# EAGLE board power demo board(11vias) (EAGLE 5.06)
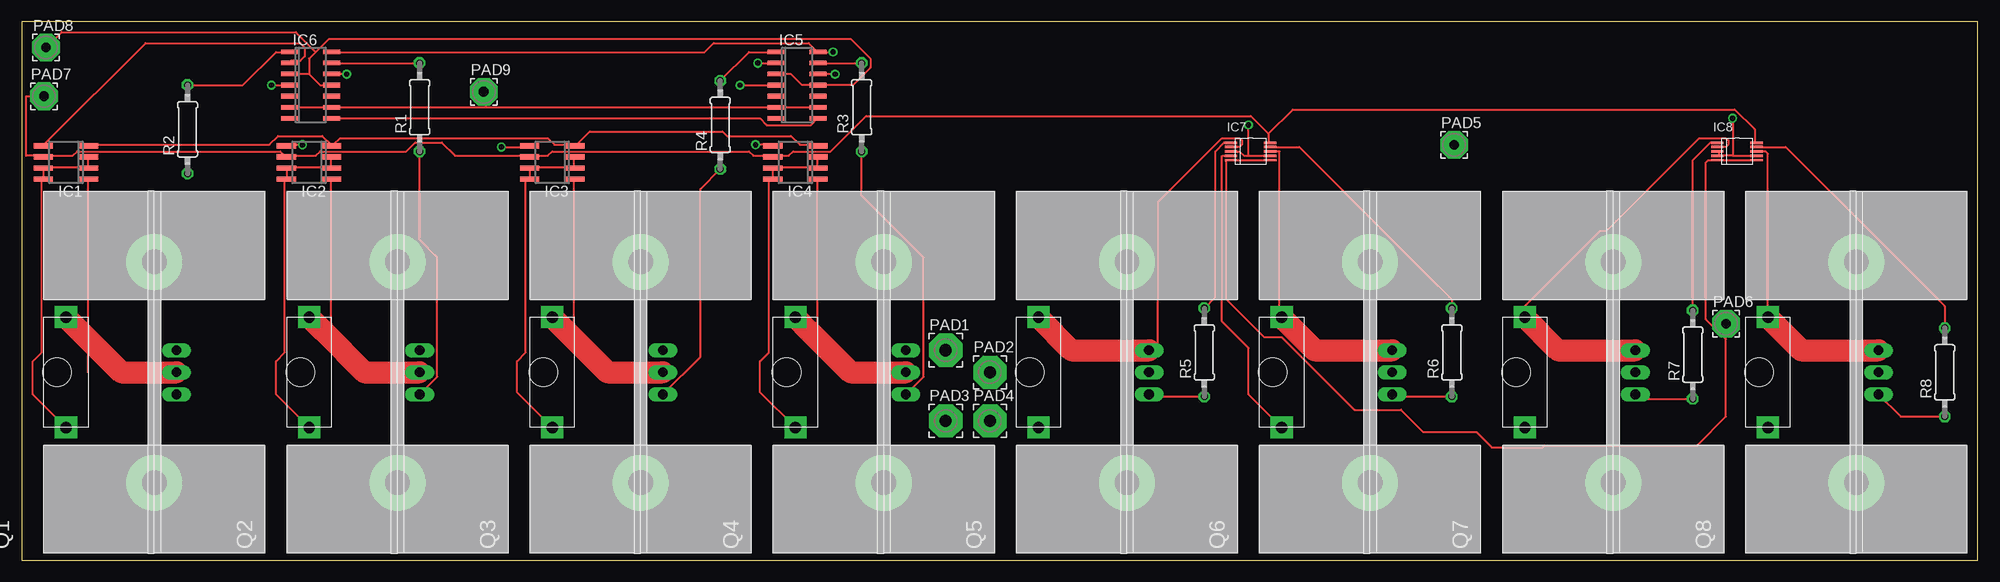
[diagram p0: board, top side]
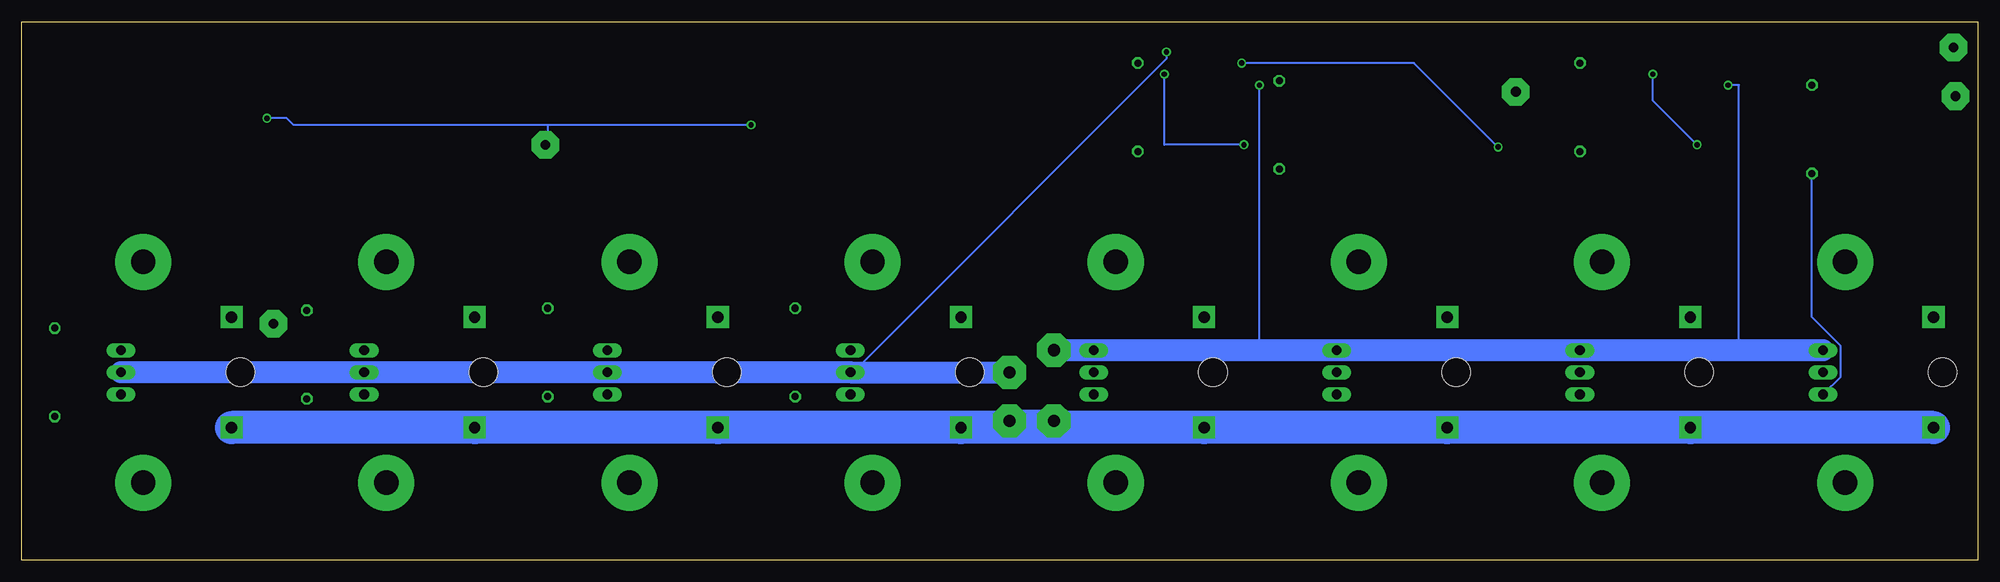
[diagram p1: board, bottom side, seen from below]

Size 224.77 x 61.9 mm. Coordinates in mm from the lower left corner, seen from the top.
Outline: 0,0 224.77,0 224.77,61.9 0,61.9 0,0
Copper layers (1*16): Top 0.035mm / dielectric 1.5mm / Bottom 0.035mm
Design rules "default *": minimum track width 10mil, minimum drill 24mil, track to track 10mil, track to pad 10mil, pad to pad 10mil, via to via 10mil, smd to smd 10mil, copper to edge 40mil, drill to drill 10mil, minimum pad ring 10mil, minimum via ring 8mil, stop-mask expansion 4mil, vias tented up to drill 0mil, thermal gap 10mil

## Footprints (pad centres in the part's own frame; a part is rotated, then mirrored left to right if it is on the bottom)
SO08 = smd 0.6 x 2.2: 1 -1.905,-2.6; 2 -0.635,-2.6; 3 0.635,-2.6; 4 1.905,-2.6; 5 1.905,2.6; 6 0.635,2.6; 7 -0.635,2.6; 8 -1.905,2.6
SO14 = smd 0.533 x 1.981: 1 -3.81,-2.219; 2 -2.54,-2.219; 3 -1.27,-2.219; 4 0,-2.219; 5 1.27,-2.219; 6 2.54,-2.219; 7 3.81,-2.219; 8 3.81,2.6; 9 2.54,2.6; 10 1.27,2.6; 11 0,2.6; 12 -1.27,2.6; 13 -2.54,2.6; 14 -3.81,2.6
UMAX10 = smd 0.28 x 1.4: 1 -1,-2; 2 -0.5,-2; 3 0,-2; 4 0.5,-2; 5 1,-2; 6 1,2.5; 7 0.5,2.5; 8 0,2.5; 9 -0.5,2.5; 10 -1,2.5
3,81/1,4 = drill 1.397 pad 3.81 octagon: 1 0,0
3,17/1,1 = drill 1.118 pad 3.175 octagon: 1 0,0
TO220-W/657-20ABP = drill 1.118 long: 1 -2.54,-2.54; 2 0,-2.54; 3 2.54,-2.54 | drill 2.8 pad 6.452 round: P$1 -12.7,0; P$2 12.7,0 | hole 3.302: 0,11.176
0207/10 = drill 0.813 octagon: 1 -5.08,0; 2 5.08,0
630HR050E = drill 1.3 pad 2.54 square: P$1 -6.35,0; P$2 6.35,0

## Placement (x,y rotation side)
IC1  AD8210D  [SO08]  5.08,45.72 90 top
IC2  AD8210D  [SO08]  33.02,45.72 90 top
IC3  AD8210D  [SO08]  60.96,45.72 90 top
IC4  AD8210D  [SO08]  88.9,45.72 90 top
IC5  [SO14]  88.9,54.61 270 top
IC6  [SO14]  33.02,54.61 270 top
IC7  MAX4233  [UMAX10]  140.97,46.99 270 top
IC8  MAX4233  [UMAX10]  196.85,46.99 270 top
PAD1  [3,81/1,4]  106.17,24.13 0 top
PAD2  [3,81/1,4]  111.25,21.59 0 top
PAD3  [3,81/1,4]  106.17,16 0 top
PAD4  [3,81/1,4]  111.25,16 0 top
PAD5  [3,17/1,1]  164.59,47.75 0 top
PAD6  [3,17/1,1]  195.83,27.18 0 top
PAD7  [3,17/1,1]  2.54,53.34 0 top
PAD8  [3,17/1,1]  2.79,58.93 0 top
PAD9  [3,17/1,1]  53.09,53.85 0 top
Q1  RFP12N10L  [TO220-W/657-20ABP]  15.24,21.59 90 top
Q2  RFP12N10L  [TO220-W/657-20ABP]  43.18,21.59 90 top
Q3  RFP12N10L  [TO220-W/657-20ABP]  71.12,21.59 90 top
Q4  RFP12N10L  [TO220-W/657-20ABP]  99.06,21.59 90 top
Q5  RFP12N10L  [TO220-W/657-20ABP]  127,21.59 90 top
Q6  RFP12N10L  [TO220-W/657-20ABP]  154.94,21.59 90 top
Q7  RFP12N10L  [TO220-W/657-20ABP]  182.88,21.59 90 top
Q8  RFP12N10L  [TO220-W/657-20ABP]  210.82,21.59 90 top
R1  50  [0207/10]  45.72,52.07 90 top
R2  50  [0207/10]  19.05,49.53 90 top
R3  50  [0207/10]  96.52,52.07 90 top
R4  50  [0207/10]  80.26,50.04 90 top
R5  50  [0207/10]  135.89,23.88 90 top
R6  50  [0207/10]  164.34,23.88 90 top
R7  50  [0207/10]  192.02,23.62 90 top
R8  50  [0207/10]  220.98,21.59 90 top
U$1  630HR050E  [630HR050E]  116.84,21.59 90 top
U$2  630HR050E  [630HR050E]  144.78,21.59 90 top
U$3  630HR050E  [630HR050E]  172.72,21.59 90 top
U$4  630HR050E  [630HR050E]  200.66,21.59 90 top
U$5  630HR050E  [630HR050E]  5.08,21.59 270 top
U$6  630HR050E  [630HR050E]  33.02,21.59 270 top
U$7  630HR050E  [630HR050E]  60.96,21.59 270 top
U$8  630HR050E  [630HR050E]  88.9,21.59 270 top

## Library data of the parts
IC1-IC8 Q1-Q8 U$1-U$8 = NEWPARTS
PAD1-PAD9 = wirepad
R1-R8 = rcl

## Nets
N$1: IC5.13 R3.2
N$2: IC1.1 Q1.2 U$5.P$1
N$3: IC2.1 Q2.2 U$6.P$1
N$4: IC3.1 Q3.2 U$7.P$1
N$5: IC7.3 IC7.7 IC8.3 IC8.4 IC8.7 PAD5.1
N$6: IC5.4 IC6.4 PAD1.1 Q1.3 Q2.3 Q3.3 Q4.3
N$7: IC7.2 Q5.3 U$1.P$2
N$8: IC7.8 Q6.3 U$2.P$2
N$9: IC8.2 Q7.3 U$3.P$2
N$10: IC8.8 Q8.3 U$4.P$2
N$11: IC5.14 IC6.14 PAD2.1 Q5.2 Q6.2 Q7.2 Q8.2
N$12: IC7.1 R5.2
N$13: Q5.1 R5.1
N$14: IC7.9 R6.2
N$15: Q6.1 R6.1
N$16: Q7.1 R7.1
N$17: IC8.1 R7.2
N$18: Q8.1 R8.1
N$19: IC8.9 R8.2
N$20: IC7.5 IC7.6 IC8.5 IC8.6 PAD6.1
N$21: IC4.1 Q4.2 U$8.P$1
N$22: IC5.6 IC5.9 IC6.6 IC6.9 PAD9.1
N$23: IC6.13 R1.2
N$24: Q1.1 R2.1
N$25: Q2.1 R1.1
N$26: Q3.1 R4.1
N$27: Q4.1 R3.1
N$28: IC5.1 R4.2
N$29: IC2.5 IC6.12
N$31: IC5.3 IC5.11 IC6.3 IC6.11 PAD8.1
N$32: IC1.5 IC6.2
N$33: IC6.1 R2.2
N$34: IC4.5 IC5.12
N$35: IC3.5 IC5.2
N$36: IC1.2 IC1.3 IC1.7 IC1.8 IC2.2 IC2.3 IC2.7 IC2.8 IC3.2 IC3.3 IC3.7 IC3.8 IC4.2 IC4.3 IC4.7 IC4.8 IC7.4 PAD3.1 PAD4.1 U$1.P$1 U$2.P$1 U$3.P$1 U$4.P$1 U$5.P$2 U$6.P$2 U$7.P$2 U$8.P$2
N$40: IC1.6 IC2.6 IC3.6 IC4.6 IC7.10 IC8.10 PAD7.1
NC: IC1.4 IC2.4 IC3.4 IC4.4
NC2: IC5.8 IC6.8

## Tracks (layer width: path | path; a pad name or v marks a point on that pad's centre or on a via)
N$1
  Top 0.254: 91.44,57.15 IC5.13 R3.2
N$2
  Top 0.254: IC1.1 7.62,43.69 7.62,27.18 | 7.62,21.59 7.62,27.18 | 7.62,27.18 6.73,26.29
  Top 2.54: Q1.2 11.43,21.59 6.73,26.29 U$5.P$1
N$3
  Top 0.254: 34.67,26.29 35.56,27.18 35.56,43.69 IC2.1
  Top 2.54: Q2.2 39.37,21.59 34.67,26.29 U$6.P$1
N$4
  Top 0.254: IC3.1 63.5,43.69 63.5,27.18 62.61,26.29
  Top 2.54: Q3.2 67.31,21.59 62.61,26.29 U$7.P$1
N$5  (via drill 0.61)
  Top 0.254: 140.97,46.48 140.46,46.48 139.95,46.99 IC7.3 | 140.97,46.48 143.26,46.48 IC7.7 | 195.07,46.48 195.07,46.99 IC8.3 | 196.6,46.48 195.07,46.48 | 196.6,46.48 199.14,46.48 IC8.7 | 195.07,46.48 IC8.4 | 140.97,46.48 v140.97,50.04 | v196.6,50.8 196.6,46.48
  Bottom 0.254: v140.97,50.04 164.34,50.04 | 164.34,50.04 193.55,50.04 194.31,50.8 v196.6,50.8 | PAD5.1 164.34,47.75 164.34,50.04
N$6  (via drill 0.6, 0.61)
  Top 0.254: v82.55,54.61 IC5.4 | v28.7,54.61 IC6.4
  Bottom 0.254: 27.43,24.13 27.43,54.61 v28.7,54.61 | 82.55,24.13 v82.55,54.61
  Bottom 2.54: Q1.3 27.43,24.13 Q2.3 Q3.3 82.55,24.13 Q4.3 PAD1.1
N$7
  Top 0.254: IC7.2 139.19,47.5 139.95,47.5 140.21,47.75 140.21,48.26 139.95,48.51 137.92,48.51 130.56,41.15 130.56,24.89 Q5.3
  Top 2.54: U$1.P$2 120.65,24.13 Q5.3
N$8
  Top 0.254: IC7.8 144.53,46.99 144.53,28.96 U$2.P$2
  Top 2.54: U$2.P$2 148.59,24.13 Q6.3
N$9
  Top 0.254: U$3.P$2 172.72,29.21 181.36,37.85 182.12,37.85 192.79,48.51 195.83,48.51 196.09,48.26 196.09,47.75 195.83,47.5 195.07,47.5 IC8.2
  Top 2.54: U$3.P$2 176.53,24.13 Q7.3
N$10
  Top 0.254: U$4.P$2 200.66,46.74 200.41,46.99 IC8.8
  Top 2.54: U$4.P$2 204.47,24.13 Q8.3
N$11  (via drill 0.61)
  Top 0.254: 35.56,58.42 IC6.14 78.49,58.42 79.5,59.44 90.42,59.44 91.44,58.42 IC5.14 v93.22,58.42
  Bottom 0.254: v93.22,58.42 93.22,57.66 128.52,22.35 Q5.2
  Bottom 2.54: Q8.2 Q7.2 Q6.2 Q5.2 PAD2.1
N$12
  Top 0.254: IC7.1 138.94,48.01 138.18,48.01 137.16,46.99 137.16,30.23 R5.2
N$13
  Top 0.254: R5.1 129.79,18.8 Q5.1
N$14
  Top 0.254: R6.2 164.34,29.97 146.81,47.5 143.51,47.5 IC7.9
N$15
  Top 0.254: R6.1 157.73,18.8 Q6.1
N$16
  Top 0.254: R7.1 185.93,18.54 Q7.1
N$17
  Top 0.254: R7.2 192.02,45.97 194.06,48.01 194.82,48.01 IC8.1
N$18
  Top 0.254: R8.1 215.9,16.51 Q8.1
N$19
  Top 0.254: R8.2 220.98,29.21 202.69,47.5 199.39,47.5 IC8.9
N$20
  Top 0.254: IC7.6 143.26,45.97 139.19,45.97 IC7.5 138.94,45.97 138.43,45.97 138.43,29.97 142.75,25.65 144.78,25.65 153.16,17.27 158.5,17.27 161.04,14.73 167.13,14.73 168.91,12.95 174.75,12.95 175.01,13.21 192.53,13.21 195.83,16.51 195.83,25.4 | IC8.6 199.14,45.97 195.07,45.97 IC8.5 194.82,45.97 193.8,45.97 193.55,45.72 193.55,27.69 195.83,25.4 | 195.83,25.4 PAD6.1
N$21
  Top 0.254: IC4.1 91.44,43.69 91.44,27.18 90.55,26.29
  Top 2.54: Q4.2 95.25,21.59 90.55,26.29 U$8.P$1
N$22
  Top 0.254: IC5.9 IC5.6 53.34,52.07 | IC6.6 IC6.9 53.34,52.07 | PAD9.1 53.34,53.85 53.34,52.07
N$23
  Top 0.254: 35.56,57.15 IC6.13 R1.2
N$24
  Bottom 0.254: R2.1 19.05,27.94 15.75,24.64 15.75,21.08 Q1.1
N$25
  Top 0.254: R1.1 45.72,36.83 47.75,34.8 47.75,21.08 Q2.1
N$26
  Top 0.254: Q3.1 77.98,23.37 77.98,42.67 R4.1
N$27
  Top 0.254: R3.1 96.52,41.91 103.63,34.8 103.63,21.08 Q4.1
N$28
  Top 0.254: R4.2 83.57,58.42 IC5.1
N$29  (via drill 0.61)
  Top 0.254: v32.26,47.75 30.48,47.75 IC2.5 | v37.34,55.88 IC6.12
  Bottom 0.254: v37.34,55.88 37.34,52.83 v32.26,47.75
N$31
  Top 0.254: 33.02,55.88 34.29,54.61 IC6.11 | 33.02,55.88 IC6.3 | IC5.3 88.39,55.88 89.66,54.61 IC5.11 95.5,54.61 97.54,56.64 97.54,57.66 95.25,59.94 35.31,59.94 33.78,58.42 | 33.02,55.88 33.02,57.66 33.78,58.42 | 33.78,58.42 31.5,60.71 4.57,60.71 PAD8.1
N$32
  Top 0.254: IC6.2 30.99,57.4 32,57.4 32.51,57.91 32.51,58.93 32,59.44 14.22,59.44 2.54,47.75 IC1.5
N$33
  Top 0.254: R2.2 25.4,54.61 29.21,58.42 IC6.1
N$34  (via drill 0.61)
  Top 0.254: v84.33,47.75 86.36,47.75 IC4.5 | v93.47,55.88 IC5.12
  Bottom 0.254: v84.33,47.75 93.47,47.75 v93.47,55.88
N$35  (via drill 0.61)
  Top 0.254: v55.12,47.5 58.42,47.5 IC3.5 | v84.58,57.15 IC5.2
  Bottom 0.254: v55.12,47.5 64.77,57.15 v84.58,57.15
N$36
  Top 0.254: 86.36,45.21 86.36,43.69 IC4.8 85.85,43.69 85.85,23.88 84.84,22.86 84.84,19.3 U$8.P$2 | 91.44,45.21 91.44,46.23 IC4.3 | 86.36,45.21 91.44,45.21 | 86.36,45.21 IC4.7 | 91.44,45.21 IC4.2 | 58.42,45.21 58.42,43.69 IC3.8 57.91,43.69 57.91,23.88 56.9,22.86 56.9,19.3 U$7.P$2 | 63.5,45.21 63.5,46.23 IC3.3 | 58.42,45.21 63.5,45.21 | 58.42,45.21 IC3.7 | 63.5,45.21 IC3.2 | 30.48,45.21 30.48,43.69 IC2.8 30.23,43.69 30.23,23.88 29.21,22.86 29.21,19.05 U$6.P$2 | 35.56,45.21 35.56,46.23 IC2.3 | 30.48,45.21 35.56,45.21 | 30.48,45.21 IC2.7 | 35.56,45.21 IC2.2 | 2.54,45.21 2.54,43.69 IC1.8 2.29,43.69 2.29,23.88 1.27,22.86 1.27,19.05 U$5.P$2 | 7.62,45.21 7.62,46.23 IC1.3 | 2.54,45.21 7.62,45.21 | 2.54,45.21 IC1.7 | 7.62,45.21 IC1.2 | U$2.P$1 140.97,19.05 140.97,24.38 137.92,27.43 137.92,46.48 138.94,46.48 IC7.4
  Bottom 2.54: PAD3.1 PAD4.1 111.25,15.24 U$1.P$1
  Bottom 3.81: U$5.P$2 U$6.P$2 U$7.P$2 U$8.P$2 U$1.P$1 U$2.P$1 U$3.P$1 U$4.P$1
N$40
  Top 0.254: 143.26,49.02 143.26,48.01 IC7.10 | 143.26,49.02 141.22,51.05 97.03,51.05 92.96,46.99 88.65,46.99 88.14,46.48 86.36,46.48 IC4.6 86.11,46.48 84.07,46.48 83.57,46.99 60.96,46.99 60.45,46.48 58.42,46.48 IC3.6 58.17,46.48 49.78,46.48 48.26,48.01 45.21,48.01 44.2,46.99 34.29,46.99 33.78,46.48 30.48,46.48 IC2.6 30.23,46.48 29.72,46.99 6.35,46.99 5.84,46.48 2.54,46.48 IC1.6 2.48,46.48 0.51,46.48 0.51,53.34 PAD7.1 | 143.26,49.02 146.05,51.82 196.85,51.82 199.14,49.53 199.14,48.01 IC8.10
NC
  Top 0.254: IC4.4 91.44,47.75 89.41,47.75 88.39,48.77 81.03,48.77 80.52,49.28 65.28,49.28 63.75,47.75 IC3.4 63.5,47.75 61.21,47.75 60.45,48.51 36.58,48.51 35.81,47.75 IC2.4 35.56,47.75 34.54,48.77 29.46,48.77 28.45,47.75 7.87,47.75 IC1.4
NC2
  Top 0.254: IC6.8 84.84,50.8 85.6,50.04 90.68,50.04 91.44,50.8 IC5.8